# Altium PCB NTP_Clock_stm32f107.PcbDoc (part 2 of 2)
Units mil, origin at the board's own origin, x right, y up, seen from the top; angles counter-clockwise.
Board outline 2362.2 x 3149.61 mil, 2 copper layers (Top Layer, Bottom Layer); 87 components, 65 nets, 304 pads, 151 vias.
Unrouted connection lines stored in the file: 12.
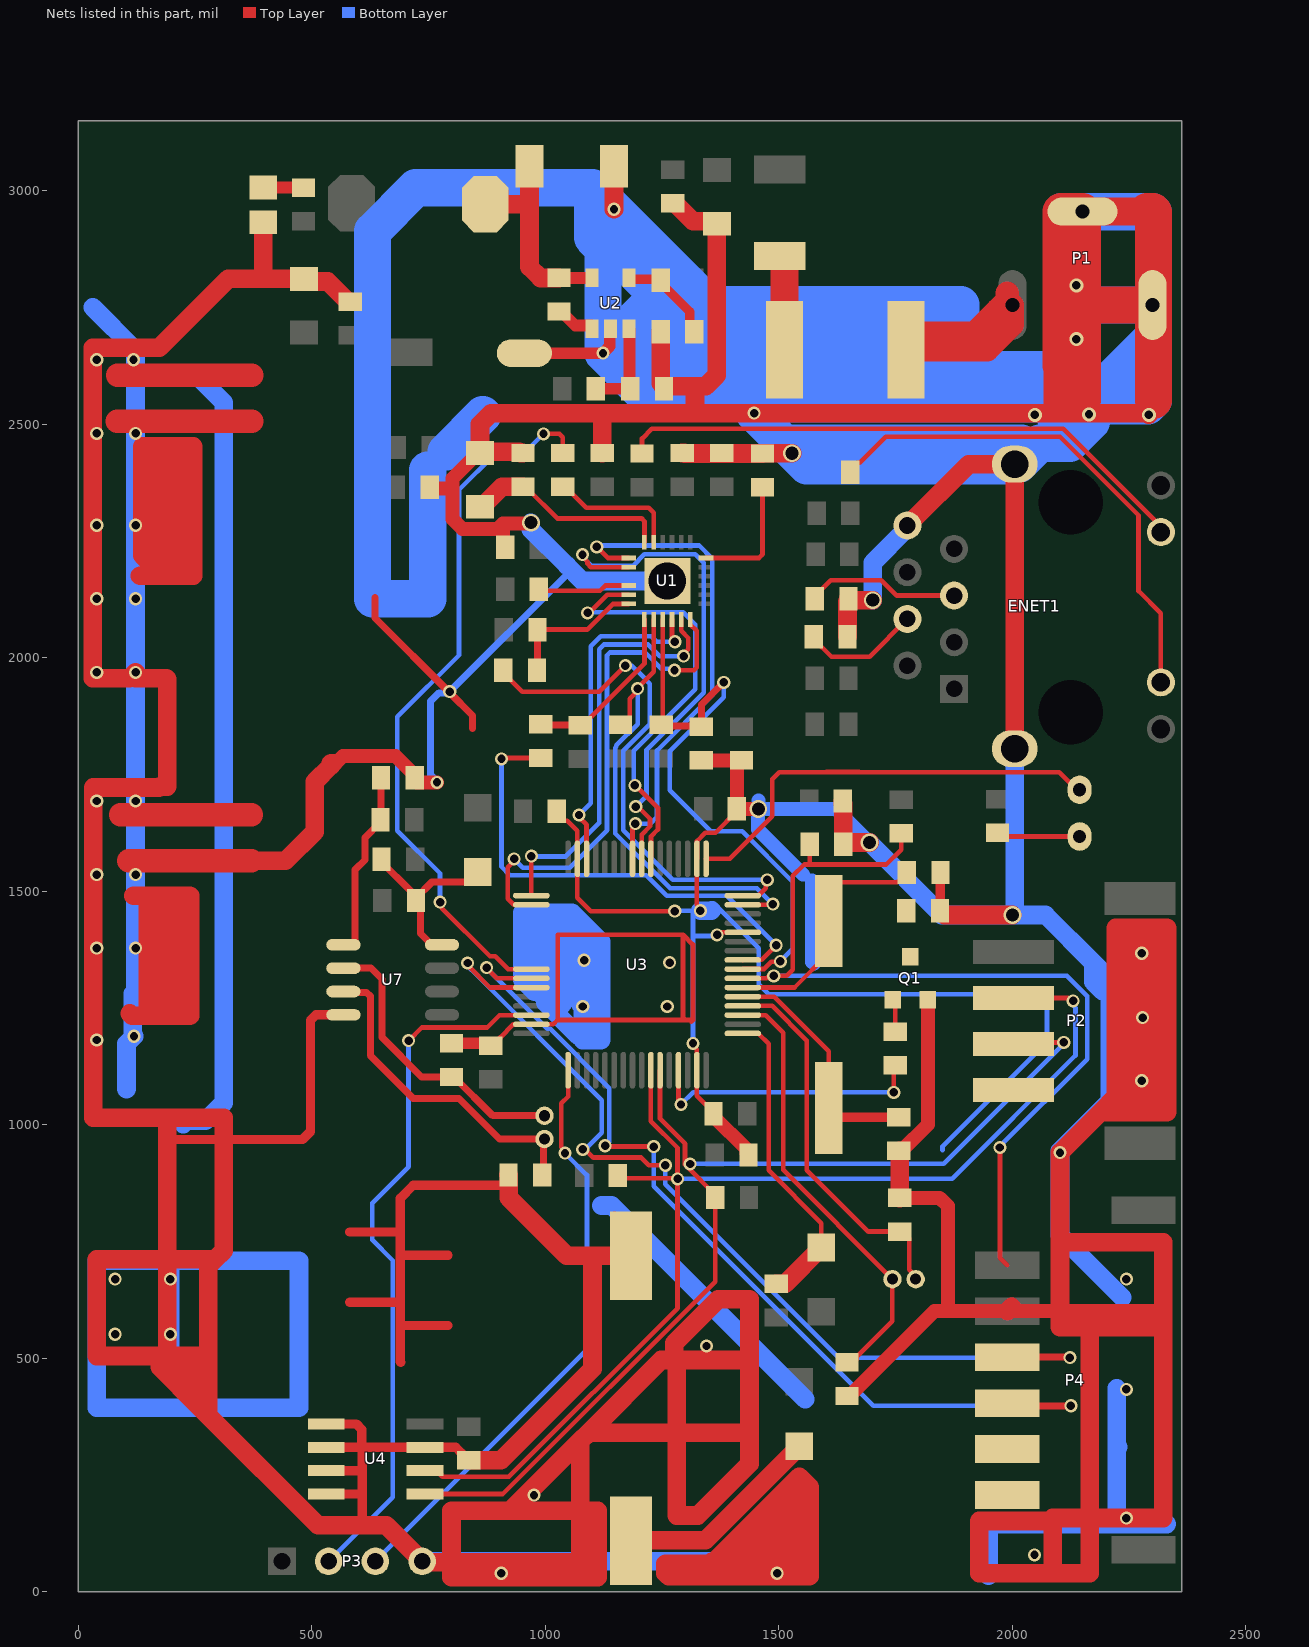
[diagram p2: the nets of this part, all layers, seen from the top]

## Via types
v1: diameter 28, hole 18, Top Layer to Bottom Layer, 115 vias
v2: diameter 38, hole 28, Top Layer to Bottom Layer, 22 vias
v3: diameter 50, hole 38, Top Layer to Bottom Layer, 9 vias
v4: diameter 30, hole 18, Top Layer to Bottom Layer, 5 vias

## Nets (pads, with @x,y where several pads share a name; then routed paths per layer and width w, separated by ;. In a path a pad name is that pad's centre, name@x,y a point inside that pad or via, vN(x,y) a via of type N, cw(c..) or ccw(c..) an arc to the next point about the centre after c; other vN are vias at no path point) (continued)
GND: BT1.2 C1.2 C2.2 C3.2 C5.2 C6.2 C7.1 C8.1 C9.1 C10.1 C11.2 C12.1 C13.1 C14.1 C15.1 C16.1 C17.2 C18.2 C19.2 C20.2 C21.1 C22.1 C23.1 C24.1 C25.1 C26.1 C27.1 C30.2 C31.1 C32.1 D2.1 ENET1.8 ENET1.13 ENET1.14 LED1.2 P1.2 P3.4 P4.2 pad.6 Q1.3 R4.1 R15.2 R20.1 R21.1 R27.1 R29.2 U1.25 U2.2 U3.12 U3.18 U3.31 U3.47 U3.63 U4.1 U4.2 U4.3 U4.4 U4.7 U7.4 | length 64969.4
  Top Layer w10: C26.1@883,1169 885.53,1169 892.92,1176.39 895.71,1176.39 903,1183.69 903,1186.47 931.02,1214.49 969.65,1214.49 U3.47@970,1214.84 ; U3.47@1003.95,1214.84 U3.47@970,1214.84 ; C25.1@1024,1671 1024,1665.69 1038.69,1651 1047,1651 1068.42,1629.58 U3.31@1068.42,1569.16 1068.42,1485.58 1097,1457 v1(1277,1457) ; 1312.56,1220.56 1316,1224 ; v1(1316,1174) 1316,1169.13 1323.97,1161.16 1323.97,1116.77 U3.63@1324.32,1116.42 1324.32,1062.05 1343.37,1043 1345.31,1043 1360,1028.31 C27.1@1360,1023 ; v1(1332,1458) 1332,1462.87 1324.32,1470.55 U3.18@1324.32,1569.16 1324.67,1569.51 1324.67,1607.19 1342.48,1625 1364.31,1625 1410,1670.69 C24.1@1410,1676 ; v1(1367.72,1406.37) 1372.44,1411.08 1372.44,1411.68 1422.37,1411.68 U3.12@1422.56,1411.87 ; U3.12@1422.43,1412 U3.12@1422.56,1411.87 ; U3.12@1422.74,1411.69 U3.12@1422.56,1411.87 ; U3.47@970,1214.84 970.35,1215.19 1017.19,1215.19 1026,1224 ; 1026,1224 1299.21,1224 ; 1026,1224 1026.33,1224.33 1026.33,1406.78 1294.74,1406.78 ; 1294.74,1406.78 1316,1385.52 1316,1224 ; 1294.74,1406.78 1294.74,1228.47 1299.21,1224 ; 1299.21,1224 1316,1224
  Top Layer w15: 635.06,2128.25 635.06,2084.75 v1@795.17,1924.64 ; v1(795.17,1927.22) v1@795.17,1924.64 ; 843.8,1848 843.8,1876.01 v1@795.17,1924.64
  Top Layer w20: 190,968 311,968 480,968 497,985 497,1223.28 508.72,1235 U7.4@567.39,1235 ; U4.4@531,209 608,209 ; U4.3@531,259 608,259 ; U4.2@531,309 607,309 ; U4.1@531,359 595.28,359 607,347.28 607,309 ; 581,620 686,620 689,623 ; 581,770 686,770 689,773 ; 608,142 608,209 ; 690,491 689,492 689,565 ; 791.63,570 694,570 689,565 ; 791.63,720 692,720 689,723 ; C17.2@836,281 830.69,281 821,290.69 821,296 808,309 U4.7@742.3,309 608,309 ; C32.1@921,892 921,886.69 904.31,870 791.63,870 717,870 689,842 689,773 ; BT1.2@1148,804 1183,769 BT1.2@1183,719 ; R29.2@1845,1458 1845.5,1458.5 1845.5,1539.5 C20.2@1846,1540 ; 607,309 608,309 ; 608,209 608,259 ; 608,259 608,309 ; 689,565 689,623 ; 689,623 689,723 ; 689,723 689,773
  Top Layer w25: C31.1@799,1174 799.5,1174.5 882.5,1174.5 C26.1@883,1175 ; C5.2@955,2652 v1(1123.45,2652) 1138.09,2666.64 1138.09,2702.64 U2.2@1139.37,2703.92
  Top Layer w30: 546,1774 551.31,1774 566.31,1789 679.31,1789 720,1748.31 C30.2@720,1743 720,1737.69 724.69,1733 v1(768,1733) ; C7.1@752,2365 755,2362 801,2362 ; C13.1@860,2438 855.59,2438 801,2383.41 801,2362 ; C14.1@914,2241.31 C14.1@914,2236 909.76,2240.24 909.76,2287.47 ; v2(969,2289) 967.47,2287.47 909.76,2287.47 ; C11.2@1334,1780 C16.1@1414.69,1780 ; C27.1@1360,1023 1360,1017.69 1430.31,947.37 1430.31,939.69 R27.1@1435,935 ; C16.1@1420,1780 C16.1@1414.69,1780 ; v2(1456,1676) C24.1@1410,1676 1410,1775.31 C16.1@1414.69,1780 ; C21.1@1646,419 1651.31,419 1832.95,600.63 1862,600.63 ; C19.2@1757,944 1758.69,944 1762.31,944 1819,1000.69 Q1.3@1819,1267 ; C22.1@1759,843 1844.43,843 1862,825.43 1862,600.63 ; 2312.75,600.63 2102,600.63 1989.33,600.63 1862,600.63 ; 801,2362 801,2296.71 822.21,2275.5 897.79,2275.5 909.76,2287.47
  Top Layer w40: v1@31,2125.98 31,1955.66 ; 110,1238 115,1233 151,1233 ; 118,1490 149,1490 ; v1@122.44,1955.66 188.34,1955.66 190,1954 190,1724 174.93,1724 172.84,1721.92 31.92,1721.92 31.92,1015 180,1015 ; v1(122.44,1968.5) 109.6,1955.66 31,1955.66 ; 132,2175 246,2175 246,2440.5 ; 153.06,2198.11 153.06,2203.33 ; 177.45,2178.94 153.06,2203.33 ; 178.53,2195.02 181.74,2198.23 229.98,2198.23 208.82,2219.39 204.25,2219.39 ; 178.53,2199.3 173.17,2204.66 173.17,2219.39 ; 196.75,2203.59 204.25,2211.1 204.25,2219.39 ; 221.41,2212.17 221.41,2415.9 246,2440.5 ; 365.14,1570.44 370.73,1564.85 443.56,1564.85 506,1627.28 506,1734 541,1769 541,1773.69 541.31,1774 546,1774 ; LED1.2@396,2932.2 396,2811 ; C6.2@582,2762 577.31,2762 533.91,2805.41 488.59,2805.41 C8.1@483,2811 396,2811 ; C17.2@836,281 905,281 1101,477 1101,719 ; C13.1@860,2438 C13.1@860,2441 ; C32.1@921,892 921.31,891.69 921.31,843.69 1046,719 1101,719 ; C12.1@952,2438 947.31,2438 944.31,2441 C13.1@860,2441 ; R20.1@1122,2438 1122,2519 1126,2523 ; v1(1147,2960) D2.1@1147,3052 ; BT1.2@1183,719 1101,719 ; C3.2@1247,2698 1247,2587.69 R4.1@1254,2580.69 ; R4.1@1254,2576 R4.1@1254,2580.69 ; C2.2@1273,2973 1277.69,2973 1316.09,2934.59 1361.41,2934.59 C1.2@1367,2929 1367,2604.43 1343.57,2581 1320.2,2581 ; R21.1@1293,2438 1297.69,2438 1298.69,2437 R15.2@1465,2437 1465.31,2437.31 1527.81,2437.31 v2(1528,2437.5) ; 1431,496 1276,496 ; v1(1496.06,39.37) 1436,39.37 ; C23.1@1637,1693 1637,1688.31 1638,1687.31 C18.2@1638,1603.69 ; C18.2@1638,1600 C18.2@1638,1603.69 ; C9.1@1647,2045 1647,2119.31 1649,2121.31 C10.1@1649,2123.31 ; C10.1@1649,2126 C10.1@1649,2123.31 ; v2(1694,1604) 1638.31,1604 C18.2@1638,1603.69 ; v2(1701,2123) 1649.31,2123 C10.1@1649,2123.31 ; C19.2@1758.69,944 1759,943.69 C22.1@1759,843 ; ENET1.8@1775.09,2282.83 1906.58,2414.32 ENET1.14@2005.01,2414.32 ENET1.13@2005.01,1804.87 ; R29.2@1845.5,1458.5 1855,1449 v2(2000,1449) ; 1989.33,600.63 1998.86,610.16 ; 2104,2677.17 2086.61,2659.78 2086.61,2523.34 ; 2108.54,2605.53 2108.54,2523.34 ; 2263.86,1416.11 2261.72,1413.97 2261.72,1044.85 2280,1063.13 ; v4(2292,2520) 2288.66,2523.34 2108.54,2523.34 ; 2307.45,566.57 2165.35,566.57 ; 31,1955.66 31,2663.49 173.11,2663.49 320.62,2811 396,2811 ; 137,2219.39 153.06,2203.33 ; 137,2219.39 153.06,2219.39 ; 137,2219.39 137,2452 ; 137,2452 153.06,2435.94 153.06,2219.39 ; 137,2452 173.17,2452 ; 149,1490 149,1235 151,1233 ; 149,1490 185,1490 ; 151,1233 181,1233 ; 153.06,2203.33 153.06,2219.39 ; 153.06,2219.39 173.17,2219.39 ; 173.17,2219.39 204.25,2219.39 ; 173.17,2219.39 173.17,2452 ; 173.17,2452 204.25,2452 ; 174,504.56 190,504.56 ; 174,504.56 39.56,504.56 39.56,711.59 190,711.59 ; 174,504.56 174,481 190,465 ; 180,1015 311,1015 311,968 311,730 292.59,711.59 ; 180,1015 190,1005 190,968 190,711.59 ; 181,1233 239,1233 ; 181,1233 181,1486 185,1490 ; 185,1490 212,1490 ; 190,465 207,448 ; 190,465 190,504.56 ; 190,504.56 190,711.59 ; 190,504.56 207,504.56 ; 190,711.59 292.59,711.59 ; 204.25,2219.39 204.25,2452 ; 204.25,2452 246,2452 246,2440.5 ; 207,448 224.86,430.14 ; 207,448 207,504.56 ; 207,504.56 232.5,479.06 ; 207,504.56 258,504.56 ; 212,1490 239,1490 239,1233 ; 212,1490 212,1260 239,1233 ; 224.86,430.14 242.72,412.28 ; 224.86,430.14 224.86,471.42 232.5,479.06 ; 232.5,479.06 271,440.56 ; 232.5,479.06 258,504.56 ; 242.72,412.28 278.44,376.56 ; 242.72,412.28 271,440.56 ; 258,504.56 278.44,504.56 ; 271,440.56 278.44,433.11 ; 271,440.56 278.44,448 ; 278.44,376.56 278.44,433.11 ; 278.44,376.56 513,142 608,142 659,142 P3.4@736,65 738,63 799,63 ; 278.44,433.11 278.44,448 ; 278.44,448 278.44,504.56 ; 278.44,504.56 278.44,512.81 277.77,513.49 277.77,696.77 292.59,711.59 ; 799,63 1075,63 ; 799,63 799,173 925,173 ; 799,63 799,31 1058,31 ; C13.1@860,2441 860,2499.57 883.43,2523 1126,2523 ; 925,173 1075,323 ; 925,173 1075,173 ; 1058,31 1112,31 1112,63 ; 1058,31 1075,48 1075,63 ; 1075,63 1075,173 ; 1075,63 1112,63 ; 1075,173 1075,323 ; 1075,173 1112,173 1112,63 ; 1075,323 1092.5,340.5 ; 1092.5,340.5 1248,496 1276,496 ; 1092.5,340.5 1281,340.5 ; 1126,2523 1322,2523 ; R4.1@1254,2580.69 1254.31,2581 1320.2,2581 ; 1257.37,39.37 1436,39.37 ; 1257.37,39.37 1264.11,32.63 1565.63,32.63 ; 1257.37,39.37 1257.37,59.63 1351.86,59.63 ; 1276,496 1281,491 1281,340.5 ; 1276,496 1276,532.12 1369.88,626 1437,626 1437,337 ; 1281,340.5 1281,163 1326,163 1437,274 1437,337 ; 1281,340.5 1433.5,340.5 1437,337 ; 1320.2,2581 1320.2,2524.8 1322,2523 ; 1322,2523 1446.66,2523 v1(1447,2523.34) 2086.61,2523.34 ; 1351.86,59.63 1401,59.63 ; 1351.86,59.63 1356.23,64 1361.85,64 1543.85,246 ; 1401,59.63 1445.48,59.63 ; 1401,59.63 1401,63.15 1543.85,206 ; 1436,39.37 1456.26,59.63 ; 1445.48,59.63 1472.66,86.81 ; 1445.48,59.63 1456.26,59.63 ; 1456.26,59.63 1483.44,86.81 ; 1456.26,59.63 1543.85,59.63 ; 1472.66,86.81 1543.85,158 ; 1472.66,86.81 1483.44,86.81 ; 1483.44,86.81 1510.63,114 ; 1483.44,86.81 1543.85,86.81 ; 1510.63,114 1543.85,147.22 ; 1510.63,114 1543.85,114 ; 1543.85,59.63 1543.85,86.81 ; 1543.85,59.63 1565.63,59.63 ; 1543.85,59.63 1543.85,54.41 1565.63,32.63 ; 1543.85,86.81 1543.85,114 ; 1543.85,114 1543.85,147.22 ; 1543.85,147.22 1543.85,158 ; 1543.85,158 1543.85,206 ; 1543.85,206 1543.85,246 ; 1543.85,246 1565.63,224.22 1565.63,59.63 ; 1565.63,32.63 1565.63,59.63 ; 2086.61,39.37 1929.13,39.37 1929.13,151.41 2080.54,151.41 2086.61,157.48 ; 2086.61,39.37 2165.35,39.37 2165.35,157.48 ; 2086.61,39.37 2086.61,157.48 ; 2086.61,157.48 2165.35,157.48 ; 2086.61,2523.34 2108.54,2523.34 ; 2102,748.03 v1(2102,940.12) 2188.88,1027 ; 2102,748.03 2102,600.63 2102,566.57 2165.35,566.57 ; 2102,748.03 2322.83,748.03 2322.83,157.48 v1(2244.09,157.48) 2165.35,157.48 ; 2165.35,157.48 2165.35,566.57 ; 2188.88,1027 2241,1027 ; 2188.88,1027 2221.38,1059.5 2221.38,1421 2255,1421 ; 2241,1027 2265,1027 ; 2241,1027 2241,1407 2255,1421 ; 2255,1421 2280,1421 ; 2265,1027 2308,1027 ; 2265,1027 2280,1042 2280,1063.13 ; 2280,1063.13 2280,1421 ; 2280,1421 2305.6,1421 ; 2305.6,1421 2331.2,1421 2331.2,1027 2308,1027 ; 2305.6,1421 2308,1418.6 2308,1027
  Top Layer w50: 83.58,2506.42 371,2506.42 ; 83.85,2604.85 371,2604.85 ; 90.27,1663.27 370.73,1663.27 ; 108.15,1564.85 370.73,1564.85
  Top Layer w60: P1.2@2150,2955 2289,2955 2300,2944 2300,2755
  Top Layer w80: 2104,2626 2104,2677.17 2104,2955 P1.2@2150,2955 2150,2756 ; 2150,2552 2150,2756 ; 2289,2955 2301,2955 ; 2300,2755 2151,2755 2150,2756 ; 2302,2551 2302,2954
  Bottom Layer w10: v1(1277,1457) 1278,1458 1317,1458 ; v1(1316,1174) 1316,1220.15 1316,1224 1316,1404 ; v1@1332,1453.13 v1(1332,1458) 1317,1458 ; 1359.86,1474 1360.65,1474 1457,1377.65 1457,1301.01 1478.53,1279.48 2074.18,1279.48 2074.18,1177.05 ; v1@1362.22,1411.87 v1(1367.72,1406.37) 1365.35,1404 1316,1404 ; 1850.39,944.88 1850.39,953.26 2074.18,1177.05 ; 2071.49,1157.11 2074.18,1159.81 2074.18,1177.05 ; 1316,1404 1316,1457 1317,1458
  Bottom Layer w15: v1(768,1733) 768,1734.79 754.5,1748.29 754.5,1907.27 771.97,1924.73 792.68,1924.73 v1(795.17,1927.22) 1046.15,2178.2 1046.15,2197.15
  Bottom Layer w30: v2@1456.06,1693.53 1456.06,1676.06 v2(1456,1676) ; 1551.42,1535.43 1454.99,1631.87 1454.99,1674.99 v2(1456,1676) ; 1571.35,1523 1571.35,1348.04 1574.8,1344.58 ; v2(1694,1604) 1622,1676 v2(1456,1676)
  Bottom Layer w40: 31,2750.12 122.44,2658.68 v1(122.44,2480.31) v1(122.44,2283.46) v1(122.44,2125.98) v1(122.44,1968.5) v1(122.44,1692.91) v1(122.44,1535.43) v1(122.44,1377.95) 122.44,1286.73 116.1,1280.39 v1@116.1,1189.16 ; 103.03,1076.15 103.03,1172.98 v1(119.22,1189.16) ; 196.85,511.81 v1(196.85,551.18) v1(196.85,669.29) 196.85,708.66 ; 224.49,1001.17 231.32,1008 272.34,1008 311,1046.66 311,2546.21 259.64,2597.57 ; P3.4@736,65 1521.69,65 ; v2(969,2289) 969,2274.3 1046.15,2197.15 1079.14,2164.16 pad.6@1261.28,2164.16 ; 976.77,1284.23 951,1310 951,1454 981.53,1454 ; 999.56,1261.44 1070.5,1190.5 ; 1004.32,1266.2 981.53,1288.99 981.53,1454 ; 1012.4,1253.7 1007.26,1258.85 1007.26,1454 ; 1028.58,1250.03 1037.4,1258.85 1037.4,1454 ; 1080,1181 1119,1181 1119,1391.95 1099.5,1411.45 ; 1099.5,1200.5 1080,1220 v1(1080,1253) 1076,1257 1076,1434.95 ; 1099.5,1253 1099.5,1411.45 ; 1120,826.77 1141.73,826.77 1556.71,411.79 ; 1147,2823.34 1147,2829.81 ; 1237.14,2733.2 1273.7,2696.63 ; 1311.08,2659.26 1354.27,2616.07 1361.34,2609 1398.34,2572 v1(1447,2523.34) ; v1(1332,1458) 1354.89,1458 1355.89,1459 ; 1507.23,2523.34 v1(1447,2523.34) ; v2(1528,2437.5) 1528,2440 1447,2521 v1(1447,2523.34) ; v2(1694,1604) 1849,1449 v2(2000,1449) ; v2(1701,2123) 1701,2203.33 1775.09,2277.42 ENET1.8@1775.09,2282.83 ; 1948.81,34.22 1948.81,144.94 2223.71,144.94 ; ENET1.13@2005.01,1804.87 2005.01,1454.01 v2(2000,1449) ; 2018.59,2523.34 v1(1447,2523.34) ; 2089.34,2523.34 v1(1447,2523.34) ; v4@2150,2523.34 2161.66,2523.34 v4(2164,2521) ; 2193.25,1285.93 2173.39,1305.8 2173.39,1346.61 ; 2223.71,435.16 2223.71,307.54 ; 2226,309.84 2223.71,307.54 ; 2235.5,629.92 2102,763.42 v1(2102,940.12) 2102,944 2209,1051 2209,1311 2173.39,1346.61 ; 2330.59,144.94 2223.71,144.94 ; 196.85,708.66 472.44,708.66 472.44,393.7 39.37,393.7 39.37,708.66 196.85,708.66 ; 981.53,1454 1007.26,1454 ; 1007.26,1454 1037.4,1454 ; 1037.4,1454 1056.95,1454 1076,1434.95 ; 1076,1434.95 1099.5,1411.45 ; v2(2000,1449) 2071,1449 2173.39,1346.61 ; 2223.71,144.94 2223.71,307.54
  Bottom Layer w60: ENET1.14@2005.01,2414.32 ENET1.14@2013.6,2414.32 ; 2059.53,2459 2106.6,2506.07 ; 2123.87,2523.34 2139.53,2539 ; 2172.53,2572 2300,2699.47
  Bottom Layer w80: 748.03,2401.57 748.03,2125.98 629.92,2125.98 629.92,2913.39 722.79,3006.26 1100.74,3006.26 ; 787.4,2440.94 866.14,2519.69 ; 1145.17,2673.73 1202.83,2616.07 ; 1147,2868.75 1240.37,2775.37 ; 1161.63,2696.63 v1@1123.45,2658.45 ; 1168.08,2696.63 1273.7,2696.63 ; 1184.65,2719.65 v1@1123.45,2658.45 ; 1311.08,2659.26 1846.57,2659.26 1889.76,2616.07 ; 1311.08,2696.63 1273.7,2696.63 ; 1361.34,2609 1889.76,2609 ; v1(1447,2523.34) 1511.34,2459 ; ENET1.14@2003.68,2411 1559.34,2411 1511.34,2459 ; ENET1.14@2013.6,2414.32 2058.27,2459 2059.53,2459 2123.2,2459 2168.77,2504.57 ; 2018.59,2459 1511.34,2459 ; 2068,2609 1889.76,2609 ; 2088,2522 2089.34,2523.34 2105,2539 ; 2105,2572 2114,2572 2150,2608 ; 2150,2513 2150,2523.34 2150,2539 ; 2172.53,2572 2150,2572 ; 2257,2572 2236.2,2572 2302,2637.8 ; 2300,2755 2150,2755 ; 2300,2955 P1.2@2150,2955 ; 2302,2699.47 2302,2637.8 ; 2302,2953 2302,2637.8 ; 1100.74,3006.26 1100.74,2899.55 1123.45,2876.85 ; 1100.74,3006.26 v1(1147,2960) ; v1@1123.45,2658.45 1123.45,2876.85 ; v1@1123.45,2658.45 1220.91,2755.91 1326.96,2755.91 ; v1@1123.45,2658.45 v1(1123.45,2652) 1159.38,2616.07 ; 1123.45,2876.85 1123.45,2936.45 v1(1147,2960) ; v1(1147,2960) 1326.96,2780.04 1326.96,2755.91 ; 1159.38,2616.07 1203.45,2572 1398.34,2572 2068,2572 2105,2609 ; 1159.38,2616.07 1202.83,2616.07 ; 1202.83,2616.07 1354.27,2616.07 1889.76,2616.07 ; 1273.7,2696.63 1870.3,2696.63 1889.76,2677.17 ; 1326.96,2755.91 1889.76,2755.91 1889.76,2677.17 ; 1889.76,2609 1889.76,2616.07 ; 1889.76,2616.07 2097.93,2616.07 2105,2609 ; 1889.76,2616.07 1889.76,2677.17 ; 2105,2609 2105,2754 ; 2105,2754 2105,2955 P1.2@2150,2955 ; 2105,2754 2106,2755 2150,2755 ; 2150,2539 2150,2572 ; 2150,2539 2290,2539 2302,2551 2302,2637.8 ; 2150,2572 2150,2608 ; 2150,2608 2150,2755 ; 2150,2755 P1.2@2150,2955
  other v1: 905.51,39.37 2047.24,78.74 975.72,206.72 2244.09,433.07 1345,526 78.74,551.18 78.74,669.29 2244.09,669.29 2277,1094 39.37,1181.1 2279,1229 1261,1253 1266,1347 1083,1352 2277,1367 39.37,1377.95 39.37,1535.43 39.37,1692.91 39.37,1968.5 39.37,2125.98 39.37,2283.46 39.37,2480.31 39.37,2637.8 118.11,2637.8
  other v4: 2048,2520 2137,2682 2137,2797
NetBT1_1: BT1.1 D4.1 | length 444.8
  Top Layer w40: BT1.1@1183,109 1184,110 1342.8,110 D4.1@1544,311.2
NetC3_1: C3.1 R2.1 U2.4 | length 209.9
  Top Layer w20: U2.4@1179,2813 1181.5,2810.5 1244.5,2810.5 R2.1@1247,2808 1247,2802.69 1309.31,2740.37 1309.31,2707.69 C3.1@1319,2698
NetC4_1: C4.1 D2.2 L2.2 U2.6 | length 489.4
  Top Layer w25: C4.1@1029,2813 U2.6@1100,2813.02
  Top Layer w40: L2.2@871,2971 966,2971 ; D2.2@966,3052 966,2971 ; C4.1@1029,2813 989.43,2813 966,2836.43 966,2971
  Top Layer w50: L2.2@871,2971 L2.2@895.86,2995.86
NetC4_2: C4.2 U2.1 | length 89.8
  Top Layer w25: C4.2@1029,2741 1034.31,2741 1064.13,2711.19 1098.72,2711.19 1100,2709.91 U2.1@1100,2704
NetC9_2: C9.2 ENET1.4 | length 254.5
  Top Layer w10: C9.2@1575,2045 1575,2039.69 1612.69,2002 1694.26,2002 ENET1.4@1775.09,2082.83
NetC10_2: C10.2 ENET1.5 | length 331.4
  Top Layer w10: C10.2@1577,2126 1577,2131.31 1611.52,2165.83 1719.25,2165.83 1752.25,2132.83 ENET1.5@1875.09,2132.83
NetC12_2: C12.2 C13.2 U1.6 | length 445.7
  Top Layer w10: C12.2@952,2366 957,2361 962.31,2361 1025.31,2298 1206.2,2298 1212.06,2292.14 U1.6@1212.06,2246.88
  Top Layer w40: C13.2@860,2323 864.41,2323 907.09,2365.69 951.69,2365.69 C12.2@952,2366
NetC19_1: C19.1 U3.5 Y1.2 | length 512.3
  Top Layer w10: U3.5@1422.74,1273.89 1490.15,1273.89 1607,1157.04 Y1.2@1607,1036
  Top Layer w20: Y1.2@1607,1036 1607,1035.53 1626.53,1016 C19.1@1757,1016
NetC20_1: C20.1 U3.6 Y1.1 | length 531.1
  Top Layer w10: U3.6@1422.74,1293.58 1533.48,1293.58 1607,1367.1 1607,1494.47 1631.53,1519 1753,1519 1754,1520 1759.31,1520 1774,1534.69 C20.1@1774,1540
NetC21_2: C21.2 U3.3 Y2.1 | length 955.6
  Top Layer w10: U3.3@1422.74,1234.52 1423.09,1234.17 1471.78,1234.17 1509,1196.96 1509,903 Y2.1@1743,669 1743,579 1667,503 1667,497.69 1652.31,483 C21.2@1647,483
NetC22_2: C22.2 U3.4 Y2.2 | length 818.5
  Top Layer w10: U3.4@1422.74,1254.21 1485.79,1254.21 1560,1180 1560,902 1691,771 1764.31,771 1779,756.31 1779,689.54 1793,675.54 Y2.2@1793,669
NetC30_1: C30.1 R35.1 U7.1 | length 403.6
  Top Layer w15: U7.1@567.39,1385 588.25,1385 592.78,1389.53 592.78,1546.19 613.6,1567.01 613.6,1614.29 647,1647.69 R35.1@647,1653 647.5,1653.5 647.5,1742.5 C30.1@648,1743
NetC31_2: C31.2 U7.2 Y3.1 | length 634.7
  Top Layer w15: U7.2@567.39,1335 627,1335 650,1312 650,1187 735,1102 C31.2@799,1102 804.31,1102 887.31,1019 Y3.1@998,1019
NetC32_2: C32.2 U7.3 Y3.2 | length 715
  Top Layer w15: U7.3@567.39,1285 569.27,1283.12 616.88,1283.12 625,1275 625,1148 717,1056 815,1056 902,969 Y3.2@998,969 995.5,966.5 995.5,894.5 C32.2@993,892
NetD1_1: D1.1 L1.2 | length 211.1
  Top Layer w60: D1.1@1502,2860 1512.08,2860 L1.2@1512.08,2659
NetD3_2: D3.2 R38.2 U3.1 | length 676.9
  Top Layer w10: U3.1@1422.74,1195.15 1456.2,1195.15 1478,1173.35 1478,902 1591,789 D3.2@1591,736.8
  Top Layer w40: R38.2@1494,659 1494.31,659.31 1513.52,659.31 D3.2@1591,736.8
NetD5_2: D5.2 R36.1 R37.1 U7.8 | length 423.8
  Top Layer w15: R37.1@649,1568 649,1562.69 710.81,1500.87 710.81,1486.87 R36.1@723,1474.69 ; U7.8@754.61,1385 U7.8@756.95,1385 ; U7.8@761,1389.53 U7.8@765.53,1385 ; U7.8@778.61,1385 U7.8@765.53,1385 ; D5.2@855,1541 833,1519 756.69,1519 723,1485.31 R36.1@723,1480 R36.1@723,1474.69 ; R36.1@723,1474.69 732.5,1465.19 732.5,1409.45 U7.8@756.95,1385 ; U7.8@756.95,1385 U7.8@765.53,1385
NetENET1_10: ENET1.10 R6.2 | length 1099
  Top Layer w10: R6.2@1653,2397 1653,2402.31 1667.69,2417 1673,2417 1729,2473 2101.96,2473 2270,2304.96 2270,2142.77 2318,2094.77 ENET1.10@2318,1947
NetENET1_11: ENET1.11 R7.2 | length 1250.6
  Top Layer w10: R7.2@1207,2437 1207,2469 1228,2490 2109,2490 2318,2281 ENET1.11@2318,2268.65
NetL1_1: L1.1 P1.1 | length 614.4
  Top Layer w50: 1989,2780 1989,2764.71 1969,2744.71 ; 2000,2755 2000,2749.33 ; 1969,2744.71 1995.38,2744.71 2000,2749.33 ; 1969,2744.71 1919.34,2695.05 1786.29,2695.05 1771.92,2680.68 L1.1@1771.92,2659 1946.29,2659 2000,2712.71 2000,2749.33
NetLED1_1: LED1.1 R5.2 | length 86.4
  Top Layer w25: LED1.1@396,3007 396.5,3006.5 481.5,3006.5 R5.2@482,3006
NetLED2_1: LED2.1 R23.2 | length 179.3
  Top Layer w10: R23.2@1968,1625 1976,1617 LED2.1@2144,1617
NetLED2_2: LED2.2 U3.17 | length 939.6
  Top Layer w10: U3.17@1344.01,1569.16 1395.16,1569.16 1486,1660 1486,1740 1500.5,1754.5 1601.49,1754.5 1601.99,1755 1672.01,1755 1672.51,1754.5 2100.36,1754.5 2137.86,1717 LED2.2@2144,1717
NetP2_1: P2.1 Q1.1 R29.1
NetQ1_2: Q1.2 R28.1 | length 70
  Top Layer w10: Q1.2@1744.2,1267 1749,1262.2 R28.1@1749,1199
NetR3_1: R3.1 R4.2 U2.3 | length 203.3
  Top Layer w25: R3.1@1108,2576 R4.2@1182,2576 1180.02,2577.98 1180.02,2702.68 U2.3@1178.74,2703.96
NetR8_1: R8.1 R10.2 U1.12 | length 308.3
  Top Layer w10: R8.1@982,1973 R8.1@983,1974 ; R10.2@984.84,2058.16 R10.2@983,2060 1090,2060 1144.94,2114.94 U1.12@1178.55,2114.94
  Top Layer w15: R8.1@983,1974 R10.2@983,2060
NetR9_1: R9.1 R11.2 U1.13 | length 372.1
  Top Layer w10: R11.2@1075,1855 1080.31,1855 1212.06,1986.75 U1.13@1212.06,2081.43
  Top Layer w15: R9.1@990,1857 991,1856 1074,1856 R11.2@1075,1855
NetR12_1: R12.1 U1.10 | length 203.5
  Top Layer w10: R12.1@986,2146 986,2140.69 988.31,2143 1116.96,2143 1128.27,2154.31 U1.10@1178.55,2154.31
NetR15_1: R15.1 U1.24 | length 268.2
  Top Layer w10: U1.24@1344,2213.37 1457.37,2213.37 1465,2221 R15.1@1465,2365
NetR22_2: R22.2 U1.5 | length 281.2
  Top Layer w10: R22.2@1037,2366 1042.31,2366 1087.66,2320.66 1221.34,2320.66 1231.75,2310.25 U1.5@1231.75,2246.88
NRST: C18.1 P4.1 R26.1 U3.7 | length 1998.8
  Top Layer w10: U3.7@1422.74,1313.26 1474.26,1313.26 1479.58,1318.58 1516.58,1318.58 1530,1332 1530,1533 1554,1557 1565,1557 ; C18.1@1566,1600 1566,1558 1565,1557 ; R26.1@1762,1624 1762,1589 1730,1557 1565,1557 ; v1(1973.36,951) 1973.36,715.04 1989.33,699.07
  Bottom Layer w10: v1(1488.94,1318.58) 2116.77,1318.58 2160,1275.35 2160,1140 1973.36,953.36 v1(1973.36,951)
PA1_RMII_REF_CLK: R13.1 U1.14 U3.15 | length 1048.9
  Top Layer w10: R13.1@1161,1856 1166.31,1856 1181,1870.69 1181,1912.13 1197.59,1928.72 v1(1197.59,1933.59) ; v1@1199,1936.92 1231.75,1969.66 U1.14@1231.75,2081.43 ; U3.15@1422.74,1470.74 1423.09,1471.09 1486.09,1471.09 v1(1487,1472)
  Bottom Layer w10: v1(1197.59,1933.59) 1197.59,1857.59 1152,1812 1152,1809.13 1149.64,1806.76 1149.64,1623.32 1266.96,1506 1453,1506 v1(1487,1472)
PA2_ETH_MDIO: R8.2 U3.16 | length 1139.6
  Top Layer w10: R8.2@910,1973 910,1967.69 950.69,1927 1115.55,1927 v1(1171.27,1982.73) ; U3.16@1422.74,1490.43 1456.2,1490.43 1471.56,1505.78 1471.56,1520.56 v1(1475,1524)
  Bottom Layer w10: v1(1171.27,1982.73) 1172.04,1981.96 1186,1981.96 1208.36,1959.59 1223.59,1944.36 1223.59,1857.22 1166.64,1800.26 1166.64,1630.36 1273,1524 v1(1475,1524)
PA7_RMII_CRS_DV: U1.11 U3.23 | length 931.1
  Top Layer w10: v1(1090.32,2095.68) 1093.68,2095.68 1132.63,2134.63 U1.11@1178.55,2134.63 ; v1(1191.64,1726.46) 1192.64,1726.46 1241,1678.09 1241,1631.88 1226.25,1617.13 1226.25,1569.51 U3.23@1225.9,1569.16
  Bottom Layer w10: v1(1090.32,2095.68) 1091.64,2097 1294.92,2097 1321.07,2070.85 1321.07,1932.07 1189.19,1800.19 1189.19,1728.9 v1(1191.64,1726.46)
PA8_MCO1: R22.1 U3.41 | length 1544.3
  Top Layer w10: v1(774.46,1476.54) 777.91,1473.09 777.91,1463.66 881.39,1360.18 892.82,1360.18 920.05,1332.95 U3.41@970,1332.95 ; v1(996,2479) 1030.14,2479 1037,2472.14 R22.1@1037,2438
  Bottom Layer w10: v1(774.46,1476.54) 774.46,1537.69 683,1629.16 683,1873 815,2005 815,2359 891.28,2435.28 952.28,2435.28 v1(996,2479)
PA9_TX1: P4.4 U3.42 | length 2022.6
  Top Layer w10: v1(874.09,1336.09) 874.09,1334.56 895.38,1313.26 U3.42@970,1313.26 ; v1@1128,953 v1(1128,954.69) 1129.69,953 v1(1232,953) ; 1989.33,403.78 1995.11,398
  Top Layer w15: 1995.11,398 v1(2125.35,398)
  Bottom Layer w10: v1(874.09,1336.09) 874.09,1334.93 1003.96,1205.05 1009.99,1205.05 1137,1078.04 1137,962 1129.69,954.69 v1(1128,954.69) ; v1(1232,953) 1232,868.03 1702.03,398 v1(2125.35,398)
PA10_RX1: P4.3 U3.43 | length 2085.1
  Top Layer w10: v1(833.56,1346.13) 833.56,1341.26 881.24,1293.58 U3.43@970,1293.58 ; v1(1080,947) 1084.87,947 1102.46,929.41 1205.14,929.41 1221.55,913 v1(1257,913)
  Top Layer w15: 1989.33,502.22 2121.78,502.22 v1(2123,501)
  Bottom Layer w10: v1(833.56,1346.13) 833.56,1341.26 840.72,1334.1 840.72,1332.28 1121,1052 1121,983.04 1092.98,955.03 1092.9,955.03 1084.87,947 v1(1080,947) ; v1(1257,913) 1257,872 1628,501 v1(2123,501)
PA13_SWDIO: P3.2 U3.46 | length 1507.9
  Top Layer w10: v1(707,1180) 735,1208 875.27,1208 901.79,1234.52 U3.46@970,1234.52
  Bottom Layer w10: P3.2@536,65 673,202 673,709 629,753 629,832 707,910 v1(707,1180)
PA14_SWCLK: P3.3 U3.49 | length 1267.9
  Top Layer w10: v1(1042,939) 1042,943.87 1034,951.87 1034,1045.49 1048.73,1060.22 U3.49@1048.73,1116.42
  Bottom Layer w10: P3.3@636,65 1089,518 1089,892 v1(1042,939)
PB6_I2C1_SCL: P2.2 R24.2 U3.58 U4.6 | length 2570.3
  Top Layer w10: U4.6@742.3,259 769.86,259 776.67,252.19 776.67,248.33 779,246 922,246 1283.02,607.02 v1(1283.02,883.82) ; R24.2@1155,891 1160.58,885.42 v1@1280.79,885.42 ; U3.58@1225.9,1116.42 1225.9,1007.1 1283.02,949.98 1283.02,891.62 1285.01,889.64 v1@1285.01,883.82 ; 2002.66,1271.21 2118.92,1271.21 2125.13,1265 v1(2130,1265)
  Bottom Layer w10: v1(1283.02,883.82) 1870.82,883.82 2135,1148 2135,1250.14 2133.44,1251.7 2133.44,1261.56 v1(2130,1265)
PB7_I2C1_SDA: P2.3 R25.2 U3.59 U4.5 | length 2338.7
  Top Layer w10: U4.5@742.3,209 909.04,209 1364,663.96 1364,849.31 v1@1303.83,909.49 ; U3.59@1245.58,1116.42 1245.58,1012.42 1299.02,958.98 1299.02,914.29 v1@1303.83,909.49 ; v1(1310.01,915.67) v1@1303.83,909.49 ; 2002.66,1172.79 2005.88,1176 v1(2110,1176)
  Bottom Layer w10: v1(1310.01,915.67) 1310.34,916 1853,916 2110,1173 v1(2110,1176)
PB8_POW: R28.2 U3.61 | length 601.3
  Top Layer w10: U3.61@1284.95,1116.42 1284.95,1053.28 1290.31,1047.91 v1(1290.31,1043.04) ; v1(1746,1069) 1746,1124 R28.2@1749,1127
  Bottom Layer w10: v1(1290.31,1043.04) 1316.27,1069 v1(1746,1069)
PB11_RMII_TX_EN: U1.16 U3.30 | length 716.8
  Top Layer w10: v1(1071.88,1662.88) 1071.88,1658.01 1088.1,1641.8 U3.30@1088.1,1569.16 ; U1.16@1271.12,2081.43 1271.12,2039.88 1277,2034 v1(1277.43,2034)
  Bottom Layer w10: v1(1071.88,1662.88) 1097,1688 1097,2023.97 1119.03,2046 1226.37,2046 1238.37,2034 v1(1277.43,2034)
PB12_RMII_TXD0: U1.17 U3.33 | length 916.2
  Top Layer w10: U3.33@970,1490.43 v1(970,1575) ; U1.17@1290.8,2081.43 1290.88,2081.35 1290.88,2057.32 1306.2,2042 1306.2,2018.07 1296,2007.87 v1(1296,2003)
  Bottom Layer w10: v1(970,1575) 971,1574 1043,1574 1115,1646 1115,2017.93 1124.96,2027.89 1220.44,2027.89 1245.33,2003 v1(1296,2003)
PB13_RMII_TXD1: U1.18 U3.34 | length 1071.7
  Top Layer w10: v1(933,1569) 933,1564.13 919.63,1550.76 919.63,1483.43 931.97,1471.09 969.65,1471.09 U3.34@970,1470.74 ; v1(1276.43,1973) 1318.14,1973 1324,1978.86 1324,2057.25 U1.18@1310.57,2070.69
  Bottom Layer w10: v1(933,1569) 952,1550 1052,1550 1132,1630 1132,2005.03 1137.86,2010.89 1213.4,2010.89 1247.84,1976.44 1272.99,1976.44 v1(1276.43,1973)
PC0_ETH_RESET: C11.1 R14.1 U1.15 U3.8 | length 1322.4
  Top Layer w10: R14.1@1248,1856 1251.43,1859.43 U1.15@1251.43,2081.43 ; U3.8@1422.74,1332.95 1423.09,1333.3 1468.3,1333.3 1484,1349 1502.76,1349 v1(1503.2,1349.44)
  Top Layer w15: R14.1@1248,1856 1250,1854 1332,1854 C11.1@1334,1852 1334,1900 1381,1947 v1(1382,1947)
  Bottom Layer w10: v1(1382,1947) 1382,1915.34 1266.2,1799.55 1266.2,1716.32 1354.36,1628.16 1421.32,1628.16 1530,1519.48 1530,1376.36 1503.2,1349.56 v1(1503.2,1349.44)
PC1_ETH_MDC: R9.2 U3.9 | length 1057.7
  Top Layer w10: v1(906,1783) 908,1785 R9.2@990,1785 ; U3.9@1422.74,1352.63 1423.09,1352.98 1462.98,1352.98 v1(1494,1384)
  Bottom Layer w10: v1(906,1783) 906,1552 924,1534 1216.33,1534 1260.33,1490 1388,1490 v1(1494,1384)
PC4_RMII_RXD0: U1.8 U3.24 | length 1122.6
  Top Layer w10: v1(1079.43,2220.43) 1079.43,2215.56 1090.24,2204.75 1090.24,2200.76 1097.31,2193.69 U1.8@1178.55,2193.69 ; v1(1193.48,1680.92) 1198.35,1680.92 1224,1655.27 1224,1638.92 1206.21,1621.13 U3.24@1206.21,1569.16
  Bottom Layer w10: v1(1079.43,2220.43) 1079.43,2215.56 1097.01,2197.99 1097.01,2197 1187.87,2197 1212.03,2221.16 1320.84,2221.16 1339,2203 1339,1925 1216.64,1802.64 1216.64,1704.07 v1(1193.48,1680.92)
PC5_RMII_RXD1: U1.7 U3.25 | length 1070.2
  Top Layer w10: v1(1110,2237) 1133.63,2213.37 U1.7@1178.55,2213.37 ; U3.25@1186.53,1569.16 1186.53,1633.53 1192.84,1639.84 v1(1192.84,1644.53)
  Bottom Layer w10: v1(1110,2237) 1113,2240 1329,2240 1357,2212 1357,1919 1239,1801 1239,1659 1224.53,1644.53 v1(1192.84,1644.53)
pads on no net: ENET1.0 ENET1.7 P1.3 P2.5 P2.6 P4.7 P4.8 U1.4 U3.2 U3.10 U3.11 U3.14 U3.20 U3.21 U3.22 U3.26 U3.27 U3.28 U3.29 U3.35 U3.36 U3.37 U3.38 U3.39 U3.40 U3.44 U3.45 U3.50 U3.54 U3.55 U3.56 U3.57 U3.62
copper on no net: | length 13926.7
  Top Layer w10: 581,670 581.5,670.5 647.5,670.5 v1(648,671) ; 581,820 583,818 652,818 v1(654,816) ; 639,1848 639,1871.06 662.78,1894.84 688.38,1894.84 ; 664.6,1848 664.6,1871.06 688.38,1894.84 ; 690.2,1848 690.2,1825.5 733.7,1782 757,1782 757.16,1782.16 ; 715.8,1848 715.8,1824.15 757.47,1782.47 810.95,1729 1137,1729 1147.16,1718.84 1147.16,1569.16 ; 741.4,1848 741.4,1825.5 820.9,1746 838.66,1746 ; 767,1848 767.96,1847.04 767.96,1816.7 838.66,1746 ; v1(782,1895.87) 780.96,1894.84 688.38,1894.84 ; 791.63,620 v1(878,620) ; 791.63,770 792.13,769.5 v1(848.5,769.5) ; v1(810,1478) 812.86,1475.14 812.86,1455.63 864.18,1404.3 871.33,1404.3 922.65,1352.98 969.65,1352.98 970,1352.63 ; v1(840.87,1462.97) 844.31,1459.53 844.31,1454.43 926.08,1372.67 969.65,1372.67 970,1372.32 ; v1(876.14,1460) 879.58,1456.56 879.58,1441.79 929.02,1392.35 969.65,1392.35 970,1392 ; v1(909.64,1451.89) 913.09,1448.44 913.09,1430.91 931.96,1412.04 969.65,1412.04 970,1411.69 ; v1(1070,1702) 1071,1702 1128,1645 1128,1604.44 1127.82,1604.25 1127.82,1569.51 1127.47,1569.16 ; 1166.84,1569.16 1166.84,1723.2 1144.04,1746 838.66,1746 ; 1773,1458 1773,1368.12 1781.6,1359.52
  Top Layer w15: 370.73,1269.58 443.56,1269.58 517.18,1343.19 517.18,1395.73 571.78,1450.33 571.78,1554.89 578.5,1561.61 578.5,1609.5 v1(551,1637) ; 370.73,1367.99 443.56,1367.99 497.39,1421.82 497.39,1444 550.78,1497.39 550.78,1572.78 v1(551,1573) ; 370.73,1466.42 485.43,1466.42 505.13,1486.13 505.13,1487.34 523.28,1505.48 v1(523.28,1509) ; 371,2211.15 648.85,2211.15 660.66,2199.34 660.66,2128.25 ; 371,2309.57 618.43,2309.57 711.86,2216.14 711.86,2128.25 ; 371,2408 555,2408 763.06,2199.94 763.06,2128.25 ; 686.26,2128.25 686.26,2073.74 v1(698,2062) ; 737.46,2128.25 737.46,2029.54 v1(738,2029) ; v1(788,2016) 788.66,2016.66 788.66,2128.25
  Top Layer w20: 372,874 372,683.89 372.68,683.21 ; 372.68,652.21 389.77,669.31 476.1,669.31 487.89,681.11 490,679 ; 444,874 446.19,871.81 579.19,871.81 581,870 ; 445,787 445,781.69 506.69,720 581,720 ; 453,371 453,376.31 462.69,386 465.34,386 476.34,397 843,397 937,491 937,777.09 894.09,820 791.63,820 ; 482.81,599.81 490,607 ; 791.63,670 879,670 908,641 908,526.64 812.36,431 474.69,431 457.19,448.5 ; 1781.6,1359.52 1786.66,1364.58 1997.6,1364.58 2002.66,1369.64 ; 457.19,448.5 450,455.69 450,461 457.19,453.81 457.19,448.5
  Top Layer w25: 381,371 381,545.45 372.66,553.79 412.03,553.79 458.06,599.81 482.81,599.81
  Bottom Layer w10: v1(648,671) 646.67,672.33 628.32,672.33 609,691.64 609,1246.25 809.41,1446.67 v1@809.41,1478.43 ; v1(654,816) 766,928 766,1380.63 797.37,1412 830,1412 841.18,1423.18 841.18,1462.66 v1(840.87,1462.97) ; v1(782,1895.87) 783.04,1894.84 877.16,1894.84 v1(1070,1702) ; v1(848.5,769.5) 849,770 849,1156.75 782,1223.75 782,1374 804,1396 856,1396 876.14,1416.14 v1(876.14,1460) ; v1(878,620) 878,794 868,804 868,1160.37 798,1230.37 798,1364 814,1380 872,1380 909.64,1417.64 v1(909.64,1451.89)
  Bottom Layer w15: v1(523.28,1509) 523.5,1509 552.36,1537.86 556.86,1537.86 661,1642 661,1889 v1(788,2016) ; v1(551,1573) 551,1576 637,1662 637,1894.7 735.51,1993.21 735.51,2026.51 v1(738,2029) ; v1(551,1637) 608,1694 608,1968.48 698,2058.48 v1(698,2062)

## Polygon pours and split planes (outlines as drawn)
GND on Top Layer "GND" (solid, remove dead copper, pour order 10): 1092.5,340.5 1281,340.5 1284,337.5 1284,171 1344,171 1348,167 1437,256 1437,623 1440,626 1363,626 1278.5,541.5 1278.5,493.5 1237.5,493.5 1236,495
GND on Top Layer "GND" (solid, remove dead copper, pour order 9): 939,179 939,185 1075,321 1075,173
GND on Top Layer "GND" (solid, remove dead copper, pour order 8): 799,173 799,31 1077,31 1112,66 1112,173
GND on Top Layer "GND" (solid, remove dead copper, pour order 6): 1026.33,1406.78 1026.33,1224.33 1315.67,1224.33 1316,1224 1316,1385.52 1294.74,1406.78
GND on Top Layer "GND" (solid, remove dead copper, pour order 5): 2102,748.03 2322.83,748.03 2322.83,157.48 2165.35,157.48 2165.35,39.37 1929.13,39.37 1929.13,151.41 1935.21,157.48 2165.35,157.48 2165.35,590.55 2158.4,583.6 2102,583.6
GND on Top Layer "GND" (solid, remove dead copper, pour order 2): 36,711.63 36,495.37 265.63,495.37 275.59,505.33 275.59,708.66
GND on Top Layer "GND" (solid, remove dead copper, pour order 1): 31.92,1721.92 180.38,1721.92 180,1721.54 180,1015 31.92,1015
GND on Top Layer "GND" (solid, remove dead copper, pour order 0): 30.66,2660.92 33.74,2664 181.81,2664 181.81,1962.19 188.34,1955.66 31,1955.66
GND on Bottom Layer "GND" (solid, remove dead copper, pour order 3): 0,3149.61 0,0 2362.2,0 2362.2,3149.61

## Keep-outs
Keep-Out Layer:
  circle w3.94: c1750.21,201 r69
  circle w3.94: c1750.21,2967 r69
  circle w3.94: c197,197 r69
  circle w3.94: c197,2953 r69
  lines w10: 0,0 2362.2,0 2362.2,3149.61 0,3149.61 0,0

## Other copper
Top Layer:
  pour cut-out: 140,995 142,997 142,1810 329,1810 346,1793 313,1760 313,988
  pour cut-out: 146,1936 148,1938 148,2728 195,2728 237,2686 237,1936
Bottom Layer:
  pour cut-out: 911.77,3006.26 910.21,3004.7 642.49,3004.7 925.2,3287.4 1205.23,3007.36 1222.92,3007.36
  pour cut-out: 669.29,1929.13 722.53,1929.13 820.59,2027.19 820.59,2266.51 909.22,2266.51 984.57,2341.85 993.43,2332.99 1807.4,2332.99 1863.54,2276.85 1860.59,2273.9 1860.59,1812.99 1727.63,1812.99 1622.75,1708.1 1121.95,1708.1 1121.95,1575.15 1045.13,1498.33 1042.18,1501.28 631.5,1501.28
  pour cut-out: 1191.82,1111.64 1779.14,1111.64 1779.14,843.07 1777.54,841.47 1773.58,845.44 1184.76,845.44
  pour cut-out: 2074.18,1279.48 2074.18,1154.17 2125.98,1102.36 2165.35,1141.73 2165.35,1269.99 2116.77,1318.58 2116.74,1318.56 2070.29,1318.56
  pour cut-out: 1457,1377.65 1457,1301.01 1478.53,1279.48 2074.18,1279.48 2074.18,1314.67 2070.29,1318.56 1524.5,1318.56 1524.5,1371.23 1506.34,1389.39
  pour cut-out: 1457,1377.65 1338.58,1496.06 1417.32,1496.06 1535.43,1377.95
  pour cut-out: 1260.33,1478.78 1260.28,1478.74 1176.46,1478.74 1176.46,1538.75 1190.64,1552.93
  pour cut-out: 1193.64,1413.15 1193.19,1413.6 1193.19,1555.39 1082.94,1555.39 1062.99,1535.43
  pour cut-out: 1540.97,1374.67 1541.22,1374.42 1541.22,1316.58 1512.18,1316.58 1499.04,1329.71
  pour cut-out: 1455.49,1675.49 1456.69,1676.69 1456.69,1732.28 1299.21,1732.28 1259.84,1692.91 1338.58,1614.17 1456.69,1614.17
  pour cut-out: 2102,942.06 2099.18,944.88 1968.5,944.88 1968.5,984.25 2165.35,1181.1 2165.35,1299.21 2204.72,1259.84 2204.72,1062.99
  pour cut-out: 2081.23,938.55 2080.85,938.92 2080.85,978.59 1944.09,841.83 2064.61,721.31 2082.37,721.31
  pour cut-out: 1932.8,143.17 1925.2,150.77 1925.2,400.97 2230.22,400.97 2231.31,399.88 2228.59,397.17 2228.59,150.22
  pour cut-out: 1929.13,354.33 1929.13,157.48 2125.98,157.48 2125.98,168.02 2088,206
  pour cut-out: 1556.71,411.79 1456.69,511.81 1456.69,551.18 1653.54,551.18 1692.91,511.81 1692.91,393.7 1653.54,393.7 1614.17,354.33
  pour cut-out: 1062.99,826.77 1062.99,984.25 1102.36,944.88 1181.1,944.88 1181.1,826.77
  pour cut-out: 1574.8,0 1574.8,393.7 1929.13,393.7 1929.13,0
  pour cut-out: 1102.36,314.96 1102.36,196.85 1259.84,196.85 1259.84,314.96
  pour cut-out: 1102.36,629.92 1100.22,627.77 1100.22,518 1253.65,518 1259.84,511.81 1259.84,629.92
  pour cut-out: 787.4,118.11 787.4,196.85 629.92,196.85 629.92,118.11
  pour cut-out: 393.7,118.11 393.7,11.22 776.19,11.22 787.4,0 787.4,118.11
  pour cut-out: 0,393.7 0,0 393.7,0 393.7,393.7
  pour cut-out: 196.85,2598.43 236.22,2598.43 393.7,2755.91 196.85,2755.91
  pour cut-out: 579.39,2899.88 579.39,2946.01 576.15,2949.25 482.27,2855.37 482.27,2814.09 536.9,2814.09 551.87,2799.12
  pour cut-out: 1102.36,3110.24 1102.36,3070.87 1062.99,3070.87 1062.99,3110.24
  pour cut-out: 1692.72,2370.68 1692.25,2370.21 1047.31,2370.21 1082.61,2334.91 1083.85,2336.15 1716.18,2336.15
  pour cut-out: 1062.99,2362.2 1692.91,2362.2 1692.91,2283.46 1417.32,2283.46 1392,2308.78 1077.04,2308.78 1062.99,2322.83
  pour cut-out: 961.8,2308.23 825.71,2172.15 821.51,2172.15 821.51,2294.67 844.19,2317.35 849.33,2312.21 971.15,2312.21
  pour cut-out: 804.64,2363.29 805.74,2364.39 805.74,2402.72 806.23,2402.72 912.84,2509.33 1075.95,2509.33 1075.95,2330.01 1064.65,2318.71 937.9,2318.71 847.99,2228.8 816.55,2228.8
  pour cut-out: 551.18,2125.98 551.18,1929.13 669.29,1929.13 748.03,2007.87 748.03,2125.98
  pour cut-out: 511.81,1496.06 511.81,1889.76 708.66,2086.61 826.77,2086.61 826.77,2007.87 669.29,1850.39 669.29,1692.91
  pour cut-out: 578.64,2645.75 578.64,2901.48 393.7,2716.54
  pour cut-out: 433.07,2795.28 511.81,2716.54 433.07,2716.54
  pour cut-out: 354.33,2755.91 472.44,2755.91 472.44,2668.81 354.33,2668.81
  pour cut-out: 1496.06,2795.28 1496.06,3089.78 1495.65,3090.19 1083.74,3090.19 1083.74,2788.08 1082.54,2786.88
  pour cut-out: 1968.5,2637.8 1496.06,2637.8 1496.06,3149.61 1968.5,3149.61
  pour cut-out: 2362.2,3149.61 2362.2,1535.43 2007.87,1535.43 2007.87,1771.65 1692.91,1771.65 1692.91,2440.94 1968.5,2440.94 1968.5,2795.28 1574.8,2795.28 1574.8,3149.61
  pour cut-out: 354.33,2755.91 290.64,2669.17 354.33,2669.17 393.7,2669.17 393.7,2755.91
  pour cut-out: 0,3149.61 0,2755.91 393.7,2755.91 393.7,3149.61

## Silkscreen, mask and mechanical layers (free items; w line width, h text height)
Top Overlay:
  circle w3.94: c1749.86,2966.75 r157.48
  circle w3.94: c1749.86,200.85 r157.48
  circle w3.94: c196.85,2952.76 r157.48
  circle w3.94: c196.85,196.85 r157.48
  text "12V/3A" at 2017.16,3035.56 h100
  text "GND" at 481,2647.66 h35 r270
  text "GND" at 482,2543.66 h35 r270
  text "CS" at 483,2435.08 h35 r270
  text "CLK" at 483,2354.99 h35 r270
  text "DAT" at 485,2249.66 h35 r270
  text "12V" at 487,2149.74 h35 r270
  text "12V" at 485,2052.74 h35 r270
  text "GND" at 484,1717.66 h35 r270
  text "GND" at 483,1609.66 h35 r270
  text "CS" at 484,1498.08 h35 r270
  text "CLK" at 484,1412.99 h35 r270
  text "GND" at 1896,1324.34 h35 r90
  text "DAT" at 482,1317.66 h35 r270
  text "SCL" at 1896,1226.01 h35 r90
  text "12V" at 488,1217.74 h35 r270
  text "SDA" at 1896,1119.51 h35 r90
  text "12V" at 486,1112.74 h35 r270
  text "3.3V" at 1896,1006.93 h35 r90
  text "NRST" at 1907,686.68 h35 r90
  text "GND" at 1907,585.34 h35 r90
  text "RX1" at 1907,499.67 h35 r90
  text "TX1" at 1904,417.51 h35 r90
  text "3.3V" at 1910,305.01 h35 r90
  text "3.3V" at 390.01,126 h35
  text "DIO" at 504.42,124 h35
  text "CLK" at 596.01,124 h35
  text "GND" at 694.34,124 h35
  text "BOOT0" at 1855.18,30 h35

## Text inside footprints (layer, text, board x,y; h text height)
BT1: Top Overlay "+" at 1297,158 h25 r90
C5: Top Overlay "+" at 635.09,2731.92 h25 r270
LED2: Top Overlay "+" at 2165,1531 h40 r90